# Altium PCB ys18-3 for yi.pcbdoc
Units mil, origin at the board's own origin, x right, y up, seen from the top; angles counter-clockwise.
Board outline 7485 x 3605 mil, 2 copper layers (Top Layer, Bottom Layer); 67 components, 100 nets, 467 pads, 142 vias.
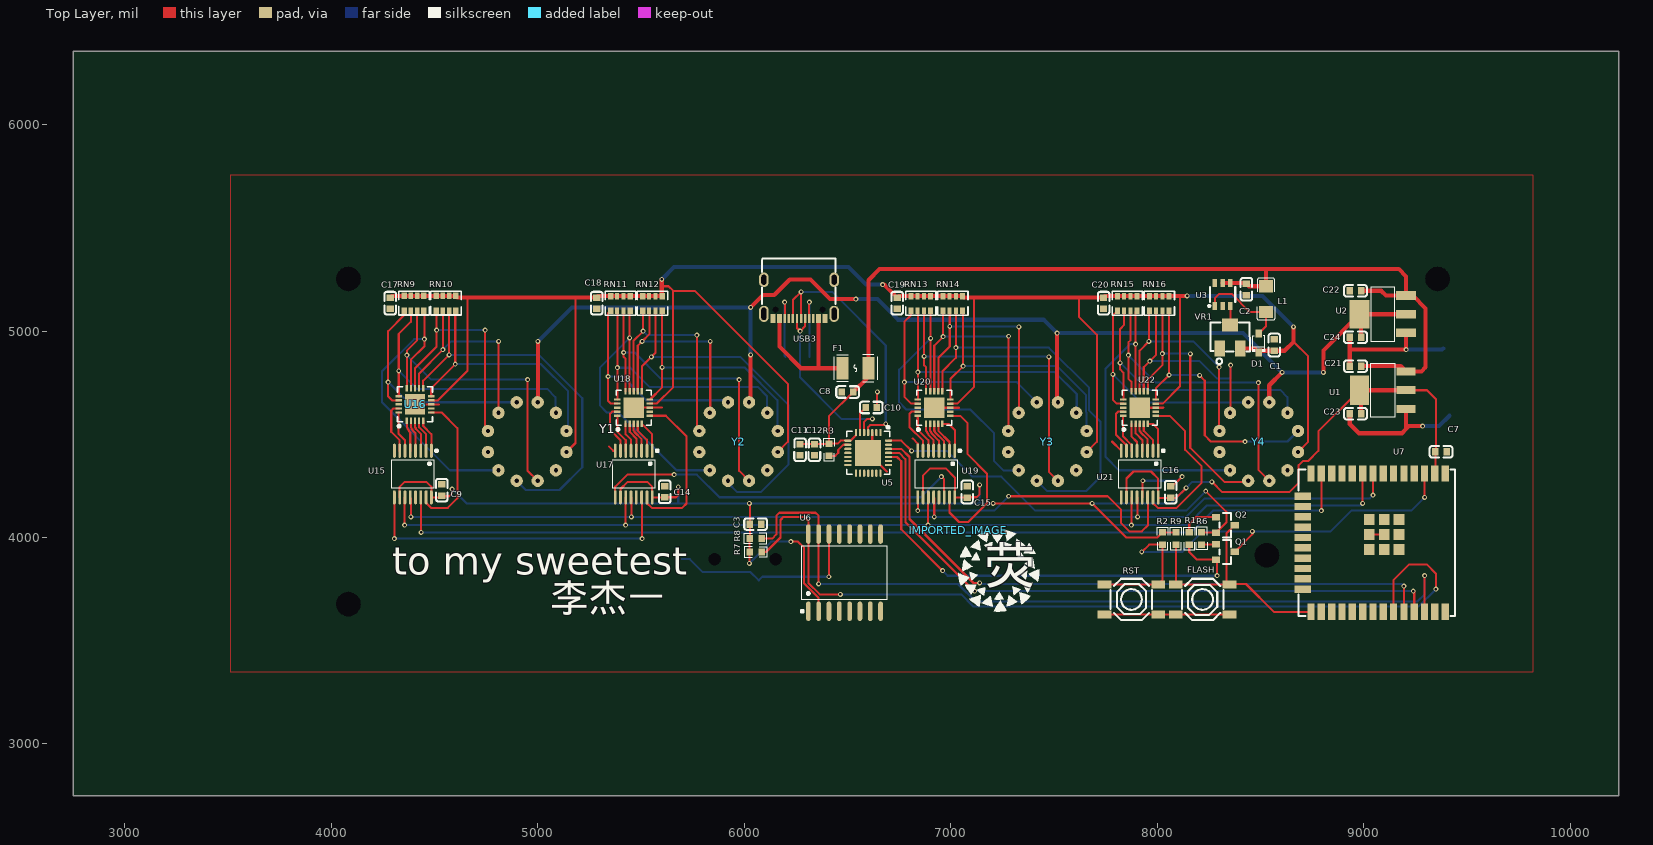
[diagram p0: Top Layer view]
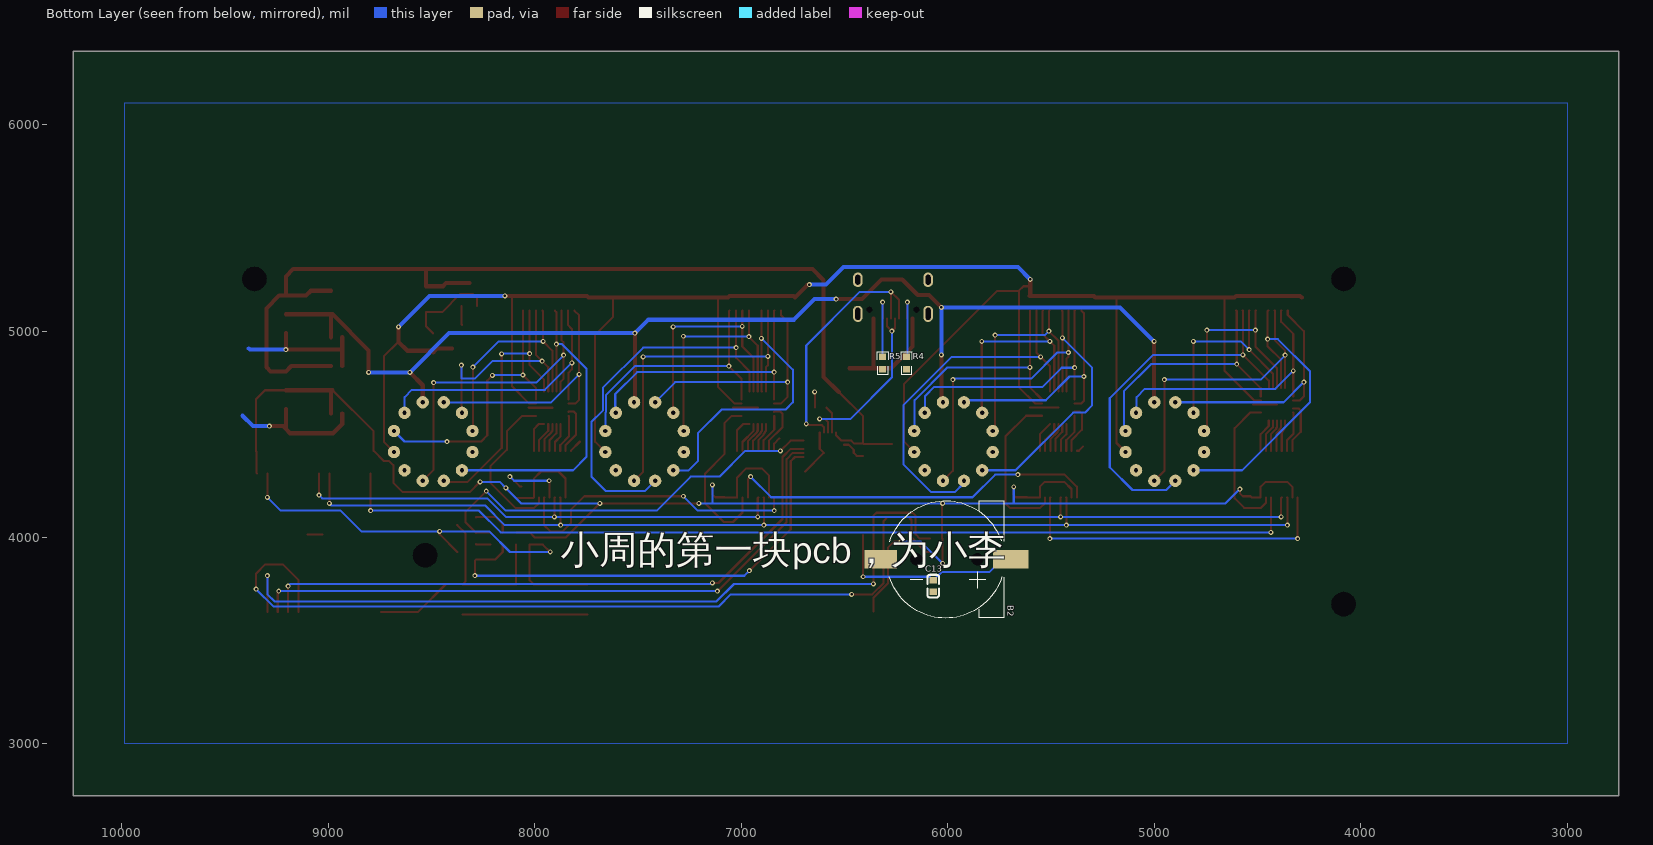
[diagram p1: Bottom Layer view, seen from below]

## Layer stack, top to bottom
Top Solder Mask Layer: solder mask 0.4, Solder Resist, Dk 3.5
Top Layer: signal copper 1.4
Dielectric 1: dielectric 12.6, FR-4, Dk 4.8
Bottom Layer: signal copper 1.4
Bottom Solder Mask Layer: solder mask 0.4, Solder Resist, Dk 3.5

## Board outline
10235,2750 2750,2750 2750,6355 10235,6355
cut-out: 4141.26,5252.4 ccw(c4082.2,5252.4) 4023.15,5252.4 ccw(c4082.2,5252.4)
cut-out: 4141.26,3677.6 ccw(c4082.2,3677.6) 4023.15,3677.6 ccw(c4082.2,3677.6)
cut-out: 9416.85,5252.4 ccw(c9357.8,5252.4) 9298.74,5252.4 ccw(c9357.8,5252.4)
cut-out: 8590.08,3913.82 ccw(c8531.02,3913.82) 8471.97,3913.82 ccw(c8531.02,3913.82)

## Components (designator, comment, footprint, x,y, rotation, side; value= is the part's Value field where it differs from the comment)
B2 "CR1220-2" BAT-SMD_CR1220-2 6010,3895 r0 bottom
C1 "22uF" C0603 8566.83,4932.09 r270 top
C2 "22uF" C0603 8431.83,5202.09 r270 top
C3 "100nF" C0603 6055,4065 r0 top
C7 "100nF" C0603 9375,4415 r0 top
C8 "100nF" C0603 6500,4705 r180 top
C9 "100nF" C0603 4534.72,4229.72 r90 top
C10 "100nF" C0603 6615,4630 r180 top
C11 "100nF" C0603 6269.81,4425.01 r270 top
C12 "100nF" C0603 6339.81,4425.01 r270 top
C13 "100nF" C0603 6070,3765 r90 bottom
C14 "100nF" C0603 5614.23,4221.67 r90 top
C15 "100nF" C0603 7079.8,4221.14 r90 top
C16 "100nF" C0603 8065,4220 r90 top
C17 "100nF" C0603 4285,5135 r270 top
C18 "100nF" C0603 5285,5135 r270 top
C19 "100nF" C0603 6740,5135 r270 top
C20 "100nF" C0603 7740,5135 r270 top
C21 "10uF" C0603 8960,4830 r180 top
C22 "10uF" C0603 8960,5195 r180 top
C23 "22uF" C0603 8960,4600 r180 top
C24 "22uF" C0603 8960,4970 r180 top
D1 "1N5817WS" SOD-323_L1.8-W1.3-LS2.5-RD 8491.83,4942.09 r90 top
F1 "ASMD1210-200" F1210 6537.99,4820 r0 top
FLASH "1TS001G-1500-1700-CT" SW-SMD_4P-L5.1-W5.1-P3.70-LS6.5-TL-2 8219.66,3700 r0 top
IMPORTED_IMAGE "IMPORTED_IMAGE" IMPORTED_IMAGE 7035,4035.76 r0 top
L1 "22uH" L1206 8526.83,5154.39 r90 top
Q1 "S8050" SOT-23_L2.9-W1.3-P1.90-LS2.4-BR 8330,3930 r180 top
Q2 "S8050" SOT-23_L2.9-W1.3-P1.90-LS2.4-BR 8330,4060 r180 top
R1 "10kΩ" R0603 8155,3995 r270 top
R2 "10kΩ" R0603 8025,3995 r270 top
R3 "1kΩ" R0603 6409.81,4425.35 r270 top
R4 "5.1kΩ" R0603 6200,4845.34 r270 bottom
R5 "5.1kΩ" R0603 6315,4845.34 r270 bottom
R6 "10kΩ" R0603 8215,3995 r90 top
R7 "10kΩ" R0603 6055,3930 r180 top
R8 "10kΩ" R0603 6055,3995 r0 top
R9 "10kΩ" R0603 8090,3995 r270 top
RN9 "10kΩ" RES-ARRAY-SMD_0603-8P-L3.2-W1.6-BL 4400,5135 r0 top
RN10 "10kΩ" RES-ARRAY-SMD_0603-8P-L3.2-W1.6-BL 4555,5135 r0 top
RN11 "10kΩ" RES-ARRAY-SMD_0603-8P-L3.2-W1.6-BL 5400,5134.29 r0 top
RN12 "10kΩ" RES-ARRAY-SMD_0603-8P-L3.2-W1.6-BL 5555,5134.29 r0 top
RN13 "10kΩ" RES-ARRAY-SMD_0603-8P-L3.2-W1.6-BL 6855,5134.29 r0 top
RN14 "10kΩ" RES-ARRAY-SMD_0603-8P-L3.2-W1.6-BL 7010,5134.29 r0 top
RN15 "10kΩ" RES-ARRAY-SMD_0603-8P-L3.2-W1.6-BL 7855,5134.29 r0 top
RN16 "10kΩ" RES-ARRAY-SMD_0603-8P-L3.2-W1.6-BL 8010,5134.29 r0 top
RST "1TS001G-1500-1700-CT" SW-SMD_4P-L5.1-W5.1-P3.70-LS6.5-TL-2 7875,3700 r180 top
U1 "AMS1117-3.3" SOT-223-3_L6.7-W3.7-P2.30-LS7.0-BR 9092.49,4713.46 r0 top
U2 "AMS1117-1.5" SOT-223_L6.3-W3.5-P2.30-LS7.0-BR 9092.49,5081.69 r0 top
U3 "MT3608" SOT-23-6_L2.9-W1.6-P0.95-LS2.8-BR 8316.83,5177.09 r270 top
U5 "CP2102-GMR" WQFN-28_L5.0-W5.0-P0.50-BL-EP3.2 6599.99,4409.99 r180 top
U6 "DS3231M+TRL" SOIC-16_L10.3-W7.5-P1.27-LS10.3-BL 6485,3830 r0 top
U7 "ESP32-WROOM-32UE(16MB)" WIFI-SMD_ESP32-WROOM-32UE 9050,3975 r270 top
U15 "SN74HC595PWR" TSSOP-16_L5.0-W4.4-P0.65-LS6.4-BL 4394.72,4307.52 r180 top
U16 "ULN2803A" QFN-20_L4.0-W4.0-P0.50-BL-EP 4405,4645 r0 top
U17 "SN74HC595PWR" TSSOP-16_L5.0-W4.4-P0.65-LS6.4-BL 5464.23,4307.52 r180 top
U18 "ULN2803A" QFN-20_L4.0-W4.0-P0.50-BL-EP 5464.23,4629.23 r0 top
U19 "SN74HC595PWR" TSSOP-16_L5.0-W4.4-P0.65-LS6.4-BL 6929.8,4307.52 r180 top
U20 "ULN2803A" QFN-20_L4.0-W4.0-P0.50-BL-EP 6919.8,4628.7 r0 top
U21 "SN74HC595PWR" TSSOP-16_L5.0-W4.4-P0.65-LS6.4-BL 7915,4307.52 r180 top
U22 "ULN2803A" QFN-20_L4.0-W4.0-P0.50-BL-EP 7915,4628.7 r0 top
USB3 "TYPE-C 16PIN 2MD(073)" USB-C-SMD_TYPE-C-6PIN-2MD-073 6265,5155 r180 top
VR1 "5kΩ" RES-ADJ-SMD_3224W 8351.83,4972.09 r0 top
Y1 "ys18-3" ys18-3 4948.35,4465 r0 top
Y2 "ys18-3" ys18-3 5971.97,4465 r0 top
Y3 "ys18-3" ys18-3 7468.03,4465 r0 top
Y4 "ys18-3" ys18-3 8491.65,4465 r0 top

## Footprints (in the part's own frame and the unit in brackets; to place one, negate y for a bottom-side part, rotate by r counter-clockwise, add the part's x,y. Pads: shape width x height; smd on the part's side, far side on the other; paste and mask are expansions set on the pad)
BAT-SMD_CR1220-2 [mm]
  rect 4.4x2.3 smd: 1(-8,0)
  rect 4x2.3 smd: 2(8,0)
  Multi-Layer board cut-out: 4.35,0 4.276,-0.325 4.068,-0.586 3.767,-0.731 3.433,-0.731 3.132,-0.586 2.924,-0.325 2.85,0 2.85,0 2.924,0.325 3.132,0.586 3.433,0.731 3.767,0.731 4.068,0.586 4.276,0.325 4.35,0
  Multi-Layer board cut-out: -3.15,0 -3.224,-0.325 -3.432,-0.586 -3.733,-0.731 -4.067,-0.731 -4.368,-0.586 -4.576,-0.325 -4.65,0 -4.65,0 -4.576,0.325 -4.368,0.586 -4.067,0.731 -3.733,0.731 -3.432,0.586 -3.224,0.325 -3.15,0
  silkscreen extent -7.22,-7.19 6.92,7.25
C0603 [mm]
  rect 0.8x0.9 smd: 1(-0.7,0) 2(0.7,0)
  silkscreen extent -1.41,-0.71 1.39,0.72
F1210 [mm]
  rect 1.485x2.781 smd: 1(-1.6,0) 2(1.6,0)
  silkscreen extent -2.67,-1.65 2.67,1.65
IMPORTED_IMAGE [mil]
  silkscreen extent 0,-395 394,0
L1206 [mm]
  rect 1.485x1.728 smd: 1(-1.593,0) 2(1.593,0)
  silkscreen extent -2.56,-1.09 2.56,1.09
QFN-20_L4.0-W4.0-P0.50-BL-EP [mil]
  rect 11x31.5 smd: 1(-39.4,-78.7) 2(-19.7,-78.7) 3(0,-78.7) 4(19.7,-78.7) 5(39.4,-78.7) 11(39.4,78.7) 12(19.7,78.7) 13(0,78.7) 14(-19.7,78.7) 15(-39.4,78.7)
  rect 31.5x11 smd: 6(78.7,-39.4) 7(78.7,-19.7) 8(78.7,0) 9(78.7,19.7) 10(78.7,39.4) 16(-78.7,39.4) 17(-78.7,19.7) 18(-78.7,0) 19(-78.7,-19.7) 20(-78.7,-39.4)
  rect 98.4x98.4 smd: 21(0,0)
  silkscreen extent -85,-111 85,85
R0603 [mil]
  rect 31.75x34.02 smd: 1(-29.66,0) 2(29.66,0)
  silkscreen extent -55,-26 55,26
RES-ADJ-SMD_3224W [mm]
  rect 1.3x2 smd: 1(-1.25,-1.45) 3(1.25,-1.45)
  rect 2x1.6 smd: 2(0,1.45)
  silkscreen extent -2.36,-3.36 2.47,1.77
RES-ARRAY-SMD_0603-8P-L3.2-W1.6-BL [mm]
  rect 0.65x0.8 smd: 1(-1.2,-0.9) 4(1.2,-0.9) 5(1.2,0.9) 8(-1.2,0.9)
  rect 0.5x0.8 smd: 2(-0.4,-0.9) 3(0.4,-0.9) 6(0.4,0.9) 7(-0.4,0.9)
  silkscreen extent -1.87,-1.45 1.87,1.47
SOD-323_L1.8-W1.3-LS2.5-RD [mm]
  rect 1x0.75 smd: 1(-1.173,0) 2(1.173,0)
  silkscreen extent -1.08,-0.8 0.9,0.8
SOIC-16_L10.3-W7.5-P1.27-LS10.3-BL [mil]
  oval 22.6x94.51 smd: 1(-175,-187.02) 2(-125,-187.02) 3(-75,-187.02) 4(-25,-187.02) 5(25,-187.02) 6(75,-187.02) 7(125,-187.02) 8(175,-187.02) 9(175,187.02) 10(125,187.02) 11(75,187.02) 12(25,187.02) 13(-25,187.02) 14(-75,187.02) 15(-125,187.02) 16(-175,187.02)
  silkscreen extent -210,-193 206,131
SOT-23-6_L2.9-W1.6-P0.95-LS2.8-BR [mm]
  rect 1x0.55 smd: 1(1.4,-0.95) 2(1.4,0) 3(1.4,0.95) 4(-1.4,0.95) 5(-1.4,0) 6(-1.4,-0.95)
  silkscreen extent -0.9,-1.78 1.52,1.55
SOT-23_L2.9-W1.3-P1.90-LS2.4-BR [mm]
  rect 1x0.8 smd: 1(1.15,-0.95) 2(1.15,0.95) 3(-1.15,0)
  silkscreen extent -0.7,-1.5 0.7,1.5
SOT-223-3_L6.7-W3.7-P2.30-LS7.0-BR [mm]
  rect 2.34x0.98 smd: 1(2.87,-2.3) 2(2.87,0) 3(2.87,2.3)
  rect 2.34x3.6 smd: 4(-2.87,0)
  silkscreen extent -1.47,-3.33 1.47,3.33
SOT-223_L6.3-W3.5-P2.30-LS7.0-BR [mil]
  rect 97x41.3 smd: 1(112.5,-90.5) 2(112.5,0) 3(112.5,90.6)
  rect 97x139.4 smd: 4(-112.5,0)
  silkscreen extent -55,-134 55,134
SW-SMD_4P-L5.1-W5.1-P3.70-LS6.5-TL-2 [mm]
  rect 1.7x1 smd: 1(-3.3,1.85) 2(3.3,1.85) 3(-3.3,-1.85) 4(3.3,-1.85)
  silkscreen extent -2.55,-2.55 2.55,2.55
TSSOP-16_L5.0-W4.4-P0.65-LS6.4-BL [mil]
  oval 13.5x68.2 smd: 1(-89.6,-112.8) 2(-64,-112.8) 3(-38.4,-112.8) 4(-12.8,-112.8) 5(12.8,-112.8) 6(38.4,-112.8) 7(64,-112.8) 8(89.6,-112.8) 9(89.6,112.8) 10(64,112.8) 11(38.4,112.8) 12(12.8,112.8) 13(-12.8,112.8) 14(-38.4,112.8) 15(-64,112.8) 16(-89.6,112.8)
  silkscreen extent -120,-119 101,70
USB-C-SMD_TYPE-C-6PIN-2MD-073 [mm]
  rect 0.6x1.1 smd: 1(-3.2,2.375) 2(-2.4,2.375) 11(2.4,2.375) 12(3.2,2.375)
  rect 0.3x1.1 smd: 3(-1.75,2.375) 4(-1.25,2.375) 5(-0.75,2.375) 6(-0.25,2.375) 7(0.25,2.375) 8(0.75,2.375) 9(1.25,2.375) 10(1.75,2.375)
  oval 1.2x1.8 hole 0.6 slot 1.2 at 90 deg: 13(-4.325,-2.375) 14(4.325,-2.375)
  oval 1.2x2 hole 0.6 slot 1.5 at 90 deg: 13(-4.325,1.825) 14(4.325,1.825)
  Multi-Layer board cut-out: -3.24,1.305 -3.205,1.153 -3.108,1.031 -2.968,0.964 -2.812,0.964 -2.672,1.031 -2.575,1.153 -2.54,1.305 -2.54,1.305 -2.575,1.457 -2.672,1.579 -2.812,1.646 -2.968,1.646 -3.108,1.579 -3.205,1.457 -3.24,1.305
  Multi-Layer board cut-out: 2.54,1.305 2.575,1.153 2.672,1.031 2.812,0.964 2.968,0.964 3.108,1.031 3.205,1.153 3.24,1.305 3.24,1.305 3.205,1.457 3.108,1.579 2.968,1.646 2.812,1.646 2.672,1.579 2.575,1.457 2.54,1.305
  silkscreen extent -4.5,-4.97 4.57,0.6
WIFI-SMD_ESP32-WROOM-32UE [mil]
  rect 78.7x35.4 smd: 1(-334.6,344.7) 2(-334.6,294.7) 3(-334.6,244.7) 4(-334.6,194.7) 5(-334.6,144.7) 6(-334.6,94.7) 7(-334.6,44.7) 8(-334.6,-5.3) 9(-334.6,-55.3) 10(-334.6,-105.3) 11(-334.6,-155.3) 12(-334.6,-205.3) 13(-334.6,-255.3) 14(-334.6,-305.3) 25(334.7,-305.3) 26(334.7,-255.3) 27(334.7,-205.3) 28(334.7,-155.3) 29(334.7,-105.3) 30(334.7,-55.3) 31(334.7,-5.3) 32(334.7,44.7) 33(334.7,94.7) 34(334.7,144.7) 35(334.7,194.7) 36(334.7,244.7) 37(334.7,294.7) 38(334.7,344.7)
  rect 35.4x78.7 smd: 15(-225,-344.7) 16(-175,-344.7) 17(-125,-344.7) 18(-75,-344.7) 19(-25,-344.7) 20(25,-344.7) 21(75,-344.7) 22(125,-344.7) 23(175,-344.7) 24(225,-344.7)
  rect 52.4x52.4 smd: 39(-111.6,121.7) 39(-111.6,49.4) 39(-111.6,-22.8) 39(-39.4,121.7) 39(-39.4,49.4) 39(-39.4,-22.8) 39(32.9,121.7) 39(32.9,49.4) 39(32.9,-22.8)
  silkscreen extent -354,-365 355,392
WQFN-28_L5.0-W5.0-P0.50-BL-EP3.2 [mm]
  oval 0.28x0.9 smd: 1(-1.501,-2.5) 2(-1.001,-2.5) 3(-0.501,-2.5) 4(0,-2.5) 5(0.5,-2.5) 6(1.001,-2.5) 7(1.501,-2.5) 15(1.501,2.5) 16(1.001,2.5) 17(0.5,2.5) 18(0,2.5) 19(-0.501,2.5) 20(-1.001,2.5) 21(-1.501,2.5)
  oval 0.9x0.28 smd: 8(2.5,-1.501) 9(2.5,-1.001) 10(2.5,-0.501) 11(2.5,0) 12(2.5,0.5) 13(2.5,1.001) 14(2.5,1.501) 22(-2.5,1.501) 23(-2.5,1.001) 24(-2.5,0.5) 25(-2.5,0) 26(-2.5,-0.501) 27(-2.5,-1.001) 28(-2.5,-1.501)
  rect 3.2x3.2 smd: 29(0,0)
  silkscreen extent -2.65,-3.3 2.65,2.65
ys18-3 [mil]
  round 60 hole 21: 1(-190.14,-50.95) 2(-139.19,-139.19) 3(-50.95,-190.14) 4(50.95,-190.14) 5(139.19,-139.19) 6(190.14,-50.95) 7(190.14,50.95) 8(139.19,139.19) 9(50.95,190.14) 10(-50.95,190.14) 11(-139.19,139.19) 12(-190.14,50.95)

## Via types
v1: diameter 24.02, hole 12.01, Top Layer to Bottom Layer, 142 vias

## Nets (pads, with @x,y where several pads share a name; then routed paths per layer and width w, separated by ;. In a path a pad name is that pad's centre, name@x,y a point inside that pad or via, vN(x,y) a via of type N, cw(c..) or ccw(c..) an arc to the next point about the centre after c; other vN are vias at no path point)
1_1: RN9.1 U16.17 Y1.10 | length 1170.5
  Top Layer w10: U16.17 4293.55,4664.7 4275,4683.25 v1(4275,4753.13) 4275,5000 4352.76,5077.76 RN9.1
  Bottom Layer w10: v1(4275,4753.13) 4372.99,4655.14 Y1.10
1_2: RN9.2 U16.16 Y1.8 | length 1327.9
  Top Layer w10: U16.16 v1(4326.3,4806.91) 4326.3,4986.3 4385,5045 4385,5098.81 RN9.2
  Bottom Layer w10: v1(4326.3,4806.91) 4413.21,4720 5045,4720 5085,4680 5085,4606.73 Y1.8
1_3: RN9.3 U16.15 Y1.4 | length 1540.6
  Top Layer w10: U16.15 v1(4365.6,4883.18) 4365.6,4905.6 4415,4955 4415,5098.81 RN9.3 ; v1(4950,4765) 4950,4324.15 Y1.4
  Bottom Layer w10: v1(4365.6,4883.18) 4483.78,4765 v1(4950,4765)
1_4: RN9.4 U16.14 Y1.2 | length 1523.8
  Top Layer w10: U16.14 4385.3,4860.3 4450,4925 v1(4450,4960.71) 4450,5096.81 RN9.4
  Bottom Layer w10: v1(4450,4960.71) 4400.71,4960.71 4245,4805 4245,4655 4574.19,4325.81 Y1.2
  other v1: 4450,4960.71
1_5: RN10.1 U16.13 Y1.12 | length 1149.8
  Top Layer w10: U16.13 4405,4820 4510,4925 v1(4510,5004.9) 4510,5097.32 RN10.1 ; v1(4745,5005) 4745,4529.15 Y1.12
  Bottom Layer w10: v1(4510,5004.9) 4744.9,5004.9 v1(4745,5005)
1_6: RN10.2 U16.12 Y1.11 | length 1056.7
  Top Layer w10: U16.12 4424.7,4794.7 v1(4540,4910) 4540,5098.81 RN10.2 ; Y1.11 4810,4605.04 v1(4810,4950)
  Bottom Layer w10: v1(4540,4910) 4580,4950 v1(4810,4950)
  other v1: 4540,4910
1_7: RN10.3 U16.11 Y1.3 | length 1876.9
  Top Layer w10: U16.11 4444.4,4759.4 v1(4570,4885) 4570,5098.81 RN10.3
  Bottom Layer w10: v1(4570,4885) 5005,4885 5215,4675 5215,4340 5105,4230 4942.26,4230 Y1.3
  other v1: 4570,4885
1_8: RN10.4 U16.10 Y1.7 | length 1259.9
  Top Layer w10: U16.10 4483.7,4723.7 v1(4600,4840) 4600,5097.32 RN10.4
  Bottom Layer w10: v1(4600,4840) 5015,4840 5145,4710 5145,4522.46 Y1.7
2_1: RN11.1 U18.17 Y2.10 | length 1126
  Top Layer w10: RN11.1 5340,5086.1 v1(5340,4779.95) 5340,4661.7 5352.78,4648.93 U18.17
  Bottom Layer w10: v1(5340,4779.95) 5410.05,4779.95 5525,4665 5911.16,4665 Y2.10
2_2: RN11.2 U18.16 Y2.8 | length 1293.5
  Top Layer w10: RN11.2 5385.53,5097.58 v1(5385.53,4822.46) U18.16
  Bottom Layer w10: v1(5385.53,4822.46) 5447.54,4822.46 5540,4730 6065,4730 6110,4685 6110,4605.36 Y2.8
2_3: RN11.3 U18.15 Y2.4 | length 1518.3
  Top Layer w10: RN11.3 v1(5415.75,4896.24) 5415.75,4874.25 5424.83,4865.17 U18.15 ; v1(5975,4765) 5975,4322.77 Y2.4
  Bottom Layer w10: v1(5415.75,4896.24) 5468.76,4896.24 5595,4770 5970,4770 v1(5975,4765)
2_4: RN11.4 U18.14 Y2.2 | length 1442.4
  Top Layer w10: U18.14 v1(5444.53,4967.52) 5444.53,5096.14 RN11.4
  Bottom Layer w10: v1(5444.53,4967.52) 5300,4822.99 5300,4640 5335,4605 5392.54,4605 5671.73,4325.81 Y2.2
  other v1: 5444.53,4967.52
2_5: RN12.1 U18.13 Y2.12 | length 1148.1
  Top Layer w10: U18.13 5464.23,4954.23 v1(5510,5000) 5510,5096.62 RN12.1 ; v1(5770,4980) 5770,4527.77 Y2.12
  Bottom Layer w10: v1(5510,5000) 5530,4980 v1(5770,4980)
2_6: RN12.2 U18.12 Y2.11 | length 1091.8
  Top Layer w10: U18.12 5483.93,4928.93 v1(5504.54,4949.54) 5540,4985 5540,5098.11 RN12.2 ; Y2.11 5835,4606.42 v1(5835,4950)
  Bottom Layer w10: v1(5504.54,4949.54) 5834.54,4949.54 v1(5835,4950)
2_7: RN12.3 U18.11 Y2.3 | length 1844.9
  Top Layer w10: U18.11 5503.63,4828.63 v1(5550.23,4875.23) 5570,4895 5570,5098.11 RN12.3
  Bottom Layer w10: v1(5550.23,4875.23) 5979.77,4875.23 6215,4640 6215,4355 6080,4220 5965,4220 5921.02,4263.98 Y2.3
  other v1: 5550.23,4875.23
2_8: RN12.4 U18.10 Y2.7 | length 1228.3
  Top Layer w10: U18.10 5602.24,4727.94 v1(5602.24,4823.86) RN12.4
  Bottom Layer w10: v1(5602.24,4823.86) 6001.14,4823.86 6160,4665 6160,4518.06 Y2.7
3_1: RN13.1 U20.17 Y3.10 | length 1193
  Top Layer w10: RN13.1 6807.76,5077.76 6775,5045 v1(6775,4752.54) 6775,4681.75 6808.35,4648.4 U20.17
  Bottom Layer w10: v1(6775,4752.54) 7319.68,4752.54 Y3.10
3_2: RN13.2 U20.16 Y3.8 | length 1336.4
  Top Layer w10: RN13.2 6841.1,5097.01 v1(6841.1,4801.31) U20.16
  Bottom Layer w10: v1(6841.1,4801.31) 7503.69,4801.31 7610,4695 7610,4606.97 Y3.8
3_3: RN13.3 U20.15 Y3.4 | length 1618.9
  Top Layer w10: RN13.3 v1(6870.75,4876.96) 6870.75,4834.25 6880.4,4824.6 U20.15 ; v1(7475,4875) 7475,4318.84 Y3.4
  Bottom Layer w10: v1(6870.75,4876.96) 7473.04,4876.96 v1(7475,4875)
3_4: RN13.4 U20.14 Y3.2 | length 1560.2
  Top Layer w10: U20.14 6902.24,4709.54 v1(6902.24,4964.83) RN13.4
  Bottom Layer w10: v1(6902.24,4964.83) 6750,4812.59 6750,4655 6785,4620 7095,4620 7210,4505 7210,4370 7255,4325 7328.03,4325 Y3.2
  other v1: 6902.24,4964.83
3_5: RN14.1 U20.13 Y3.12 | length 1187.3
  Top Layer w10: U20.13 6919.8,4929.8 v1(6962.76,4972.76) RN14.1 ; Y3.12 7280,4518.06 v1(7280,4975)
  Bottom Layer w10: v1(6962.76,4972.76) 7277.76,4972.76 v1(7280,4975)
3_6: RN14.2 U20.12 Y3.11 | length 1167.2
  Top Layer w10: U20.12 6939.5,4869.5 6995,4925 v1(6995,5022.84) 6995,5098.11 RN14.2 ; Y3.11 7330,4605.36 v1(7330,5020)
  Bottom Layer w10: v1(6995,5022.84) 7327.16,5022.84 v1(7330,5020)
  other v1: 6995,5022.84
3_7: RN14.3 U20.11 Y3.3 | length 1955
  Top Layer w10: U20.11 6959.2,4804.2 7025,4870 v1(7025,4919.78) 7025,5098.11 RN14.3
  Bottom Layer w10: v1(7025,4919.78) 7475.22,4919.78 7670,4725 7670,4615 7725,4560 7725,4295 7655,4225 7466.94,4225 Y3.3
  other v1: 7025,4919.78
3_8: RN14.4 U20.10 Y3.7 | length 1285.7
  Top Layer w10: U20.10 6998.5,4768.5 v1(7060,4830) 7060,5096.1 RN14.4
  Bottom Layer w10: v1(7060,4830) 7515,4830 7654,4691 7654,4608.37 7658.17,4604.2 Y3.7
4_1: RN15.1 U22.17 Y4.10 | length 1212.1
  Top Layer w10: RN15.1 7785,5076.1 v1(7785,4790.34) 7785,4666.95 7803.55,4648.4 U22.17
  Bottom Layer w10: v1(7785,4790.34) 7920.34,4655 8440.56,4655 Y4.10
  other v1: 7785,4790.34
4_2: RN15.2 U22.16 Y4.8 | length 1401.1
  Top Layer w10: U22.16 7836.3,4798.7 7820,4815 v1(7820,4846.13) 7820,5010 7840,5030 7840,5098.11 RN15.2
  Bottom Layer w10: v1(7820,4846.13) 7951.13,4715 8595,4715 8630,4680 8630,4605.04 Y4.8
4_3: RN15.3 U22.15 Y4.4 | length 1584.7
  Top Layer w10: RN15.3 7870.75,4955.75 7860,4945 v1(7860,4883.64) 7860,4770 7875,4755 7875,4708 U22.15 ; v1(8490,4750) 8490,4327.46 Y4.4
  Bottom Layer w10: v1(7860,4883.64) 7993.64,4750 v1(8490,4750)
4_4: RN15.4 U22.14 Y4.2 | length 1646.4
  Top Layer w10: U22.14 v1(7895.3,4937) 7895.3,5091.92 RN15.4
  Bottom Layer w10: v1(7895.3,4937) 7868.29,4937 7750,4818.7 7750,4390 7814.19,4325.81 Y4.2
  other v1: 7895.3,4937
4_5: RN16.1 U22.13 Y4.12 | length 1112.7
  Top Layer w10: U22.13 7915,4905 v1(7960,4950) 7960,5096.1 RN16.1 ; v1(8300,4825) 8300,4517.46 Y4.12
  Bottom Layer w10: v1(7960,4950) 8175,4950 v1(8300,4825)
4_6: RN16.2 U22.12 Y4.11 | length 1139
  Top Layer w10: U22.12 7934.7,4824.7 v1(7964.63,4854.63) 7995,4885 7995,5098.11 RN16.2 ; Y4.11 8355,4606.73 v1(8355,4835)
  Bottom Layer w10: v1(7964.63,4854.63) 8205.37,4854.63 8290,4770 8355,4770 v1(8355,4835)
  other v1: 7964.63,4854.63
4_7: RN16.3 U22.11 Y4.3 | length 1362.5
  Top Layer w10: U22.11 7954.4,4764.4 8025,4835 v1(8025,4891.14) 8025,5098.11 RN16.3 ; v1(8160,4890) 8160,4435 8325,4270 8435.85,4270 Y4.3
  Bottom Layer w10: v1(8025,4891.14) 8158.86,4891.14 v1(8160,4890)
  other v1: 8025,4891.14
4_8: RN16.4 U22.10 Y4.7 | length 1391.4
  Top Layer w10: U22.10 7993.7,4723.7 v1(8057.24,4787.24) RN16.4 ; v1(8205,4785) 8230,4760 8230,4495 8260,4465 v1(8425,4465)
  Bottom Layer w10: v1(8057.24,4787.24) 8202.76,4787.24 v1(8205,4785) ; v1(8425,4465) 8630.85,4465 Y4.7
  other v1: 8057.24,4787.24
$1N4284: D1.2 L1.1 U3.1 | length 447.9
  Top Layer w10: U3.1 8279.43,5159.43 8300,5180 8360,5180 8448.31,5091.69 L1.1 8526.83,5023.26 D1.2
$1N4599: U3.3 VR1.2 | length 93.8
  Top Layer w10: VR1.2 8354.23,5031.58 U3.3
$1N14386: R3.2 U5.9 | length 122.8
  Top Layer w10: R3.2 6440.69,4395.69 6455,4410 6455,4425 6479.4,4449.4 U5.9
$1N14387: C10.2 U5.6 | length 132.7
  Top Layer w10: U5.6 6560.6,4603.16 C10.2
$1N15726: Q1.1 R6.1 | length 70.6
  Top Layer w10: R6.1 8282.66,3965.34 Q1.1
$1N15827: Q2.1 R1.1 | length 185.6
  Top Layer w10: R1.1 8155,4065 8190,4100 8282.13,4100 Q2.1
$1N19738: B2.1 C13.2 U6.14 | length 966.6
  Top Layer w10: v1(6410,3810) U6.14@6410,4012.02
  Bottom Layer w10: B2.1 5736.38,3895 5798.62,3832.76 6029.8,3832.76 C13.2 6087.44,3810 v1(6410,3810)
$1N85374: U15.15 U16.6 | length 705.3
  Top Layer w10: U15.15 4458.72,4167.37 4482.47,4143.62 4563.62,4143.62 4610,4190 4610,4530 4534.4,4605.6 U16.6
$1N85867: U15.1 U16.5 | length 162.5
  Top Layer w10: U16.5 4445,4565.7 4445,4540 4484.32,4500.68 U15.1
$1N86064: U15.2 U16.4 | length 160.1
  Top Layer w10: U16.4 4424.7,4533.55 4458.72,4499.53 U15.2
$1N86261: U15.3 U16.3 | length 157.6
  Top Layer w10: U16.3 4405,4533.55 4408.7,4529.85 4408.7,4526.92 4433.12,4502.5 U15.3
$1N86458: U15.4 U16.2 | length 155.2
  Top Layer w10: U16.2 4385.3,4533.55 4389,4529.85 4389,4526.92 4392.7,4523.22 4392.7,4520.3 4407.52,4505.48 U15.4
$1N86655: U15.5 U16.1 | length 152.7
  Top Layer w10: U16.1 4365.6,4533.55 4369.3,4529.85 4369.3,4526.92 4373,4523.22 4373,4520.3 4376.7,4516.6 4376.7,4513.67 4381.92,4508.45 U15.5
$1N86852: U15.6 U16.20 | length 198.8
  Top Layer w10: U16.20 4325,4604.3 4325,4502.74 4356.32,4471.42 U15.6
$1N87053: U15.7 U16.19 | length 252.1
  Top Layer w10: U16.19 4326,4625 4300,4625 4290,4615 4290,4512.14 4330.72,4471.42 U15.7
$1N88441: U17.15 U18.6 | length 781.2
  Top Layer w10: U17.15 5528.23,4167.37 5551.98,4143.62 5698.62,4143.62 5720,4165 5720,4490 5620.17,4589.83 U18.6
$1N88442: U17.6 U18.20 | length 186.6
  Top Layer w10: U18.20 5385,4589.3 5385,4512.25 5425.83,4471.42 U17.6
$1N88443: U17.7 U18.19 | length 240.3
  Top Layer w10: U18.19 5385.05,4610 5360,4610 5350,4600 5350,4521.65 5400.23,4471.42 U17.7
$1N88444: U17.1 U18.5 | length 151
  Top Layer w10: U18.5 5553.83,4500.33 U17.1
$1N88445: U17.2 U18.4 | length 148.6
  Top Layer w10: U18.4 5483.93,4517.78 5528.23,4473.48 U17.2
$1N88446: U17.3 U18.3 | length 146.1
  Top Layer w10: U18.3 5464.23,4517.78 5467.93,4514.08 5467.93,4511.15 5502.63,4476.45 U17.3
$1N88447: U17.4 U18.2 | length 143.7
  Top Layer w10: U18.2 5445,4550.05 5445,4511.45 5477.03,4479.42 U17.4
$1N88448: U17.5 U18.1 | length 141.2
  Top Layer w10: U18.1 5425,4550.35 5425,4500 5451.43,4473.57 U17.5
$1N89132: U19.15 U20.6 | length 836.2
  Top Layer w10: U19.15 6993.8,4121.2 7040,4075 7085,4075 7175,4165 7175,4310 7080,4405 7080,4555 7045.7,4589.3 U20.6
$1N89133: U19.6 U20.20 | length 190.7
  Top Layer w10: U20.20 6840,4588.2 6840,4522.82 6891.4,4471.42 U19.6
$1N89134: U19.7 U20.19 | length 252.6
  Top Layer w10: U20.19 6840.1,4610 6810,4610 6800,4600 6800,4535 6865.8,4469.2 U19.7
$1N89135: U19.1 U20.5 | length 172.7
  Top Layer w10: U20.5 6990,4550 7019.4,4520.6 U19.1
$1N89136: U19.2 U20.4 | length 152.2
  Top Layer w10: U20.4 6939.5,4517.25 6993.8,4462.95 U19.2
$1N89137: U19.3 U20.3 | length 149.7
  Top Layer w10: U20.3 6919.8,4517.25 6923.5,4513.55 6923.5,4510.62 6968.2,4465.92 U19.3
$1N89138: U19.4 U20.2 | length 147.3
  Top Layer w10: U20.2 6900.1,4517.25 6903.8,4513.55 6903.8,4510.62 6907.5,4506.92 6907.5,4503.99 6942.6,4468.89 U19.4
$1N89139: U19.5 U20.1 | length 144.8
  Top Layer w10: U20.1 6880.4,4517.25 6884.1,4513.55 6884.1,4510.62 6887.8,4506.92 6887.8,4503.99 6891.5,4500.29 6891.5,4497.37 6917,4471.87 U19.5
$1N89823: U21.15 U22.6 | length 778.7
  Top Layer w10: U21.15 7979,4167.37 8002.75,4143.62 8093.62,4143.62 8215,4265 8215,4345 8135,4425 8135,4515 8060.7,4589.3 U22.6
$1N89824: U21.6 U22.20 | length 186.8
  Top Layer w10: U22.20 7835,4588 7835,4489.27 7876.6,4447.67 U21.6
$1N89825: U21.7 U22.19 | length 241.7
  Top Layer w10: U22.19 7835.3,4610 7810,4610 7800,4600 7800,4498.67 7851,4447.67 U21.7
$1N89826: U21.1 U22.5 | length 165.5
  Top Layer w10: U22.5 7980,4550 8004.6,4525.4 U21.1
$1N89827: U21.2 U22.4 | length 148
  Top Layer w10: U22.4 7934.7,4517.25 7979,4472.95 U21.2
$1N89828: U21.3 U22.3 | length 145.6
  Top Layer w10: U22.3 7915,4517.25 7918.7,4513.55 7918.7,4510.62 7953.4,4475.92 U21.3
$1N89829: U21.4 U22.2 | length 143.4
  Top Layer w10: U22.2 7895,4549.7 7895,4505 7927.8,4472.2 U21.4
$1N89830: U21.5 U22.1 | length 141.2
  Top Layer w10: U22.1 7875,4549.4 7875,4490 7902.2,4462.8 U21.5
$1N135441: Y1.5
$1N140475: Y2.5
$1N142648: Y3.5
$1N144821: Y4.5
+1.5V: C24.1 U2.2 U2.4 Y1.9 Y2.9 Y3.9 Y4.9 | length 6082.3
  Top Layer w20: v1(4999.3,4655.14) 5000,4655.85 v1(5000,4950) ; v1(6022.92,4655.14) 6030,4662.23 v1(6030,4885) ; v1(6030,5115) 6090,5175 6145,5175 6220,5250 6320,5250 6415,5155 v1(6540,5155) ; v1(7515,4990) 7515,4659.12 v1(7518.98,4655.14) ; v1(8542.6,4655.14) 8542.6,4737.6 v1(8605,4800) ; v1(8805,4800) 8805,4906.7 U2.4 ; C24.1 8987.56,5074.12 U2.4 ; U2.2 U2.4
  Bottom Layer w20: v1(5000,4950) 5165,5115 v1(6030,5115) v1(6030,4885) ; v1(6540,5155) 6645,5155 6745,5055 7450,5055 v1(7515,4990) 8415,4990 v1(8605,4800) v1(8805,4800) ; Y4.9@8535.14,4655.14 v1(8542.6,4655.14)
  other v1: 6030,5115
+3.3V: C3.1 C7.1 C9.1 C14.1 C15.1 C16.1 C23.1 R2.1 R7.2 R8.1 R9.1 U1.2 U1.4 U6.2 U7.2 U15.10 U15.16 U17.10 U17.16 U19.10 U19.16 U21.10 U21.16 | length 9195.6
  Top Layer w10: U15.10 4330.72,4245.72 4355,4270 4460.14,4270 4484.32,4245.82 U15.16 4527.28,4194.72 C9.1 4536.88,4200 4570,4200 4585,4215 v1(4585,4235) ; U17.10 5400.23,4235.23 5435,4270 5529.65,4270 5553.83,4245.82 U17.16 5613.61,4194.72 C14.1 5615.12,4195 5670,4195 5680,4205 v1(5680,4245) ; v1(6025,3875) 6025,3929.66 R7.2 R8.1 6027.44,3997.1 C3.1 6027.44,4162.56 v1(6025,4165) ; v1(6225,3980) 6260,3980 6290,3950 6290,3777.23 6360,3707.23 U6.2 ; U19.10 6865.8,4300.8 6900,4335 6975,4335 7019.4,4290.6 U19.16 7020.54,4193.58 C15.1 7081.22,4195 7125,4195 7140,4210 v1(7140,4255) ; v1(7205,4165) v1(7685,4165) 7850,4000 8000.34,4000 R2.1 R9.1 ; U21.10 7851,4286 7885,4320 7970,4320 8004.6,4285.4 U21.16 8006.88,4192.44 C16.1 8092.44,4192.44 v1(8140,4240) ; v1(8265,4270) 8315,4220 8640,4220 8685,4265 8685,4350 8705,4370 8730,4370 8780,4420 8780,4513.96 U1.4 ; U1.2 9306.54,4713.46 9350,4670 9350,4417.56 C7.1 9347.44,4312.34 U7.2
  Top Layer w20: C23.1 8987.56,4705.4 U1.4 U1.2
  Bottom Layer w10: v1(4585,4235) 4655,4165 5680,4165 ; v1(5680,4245) 5680,4165 ; v1(6025,3875) 6130,3980 v1(6225,3980) ; v1(7140,4255) 7140,4165 ; v1(7205,4165) 7140,4165 ; v1(7685,4165) 8065,4165 v1(8140,4240) 8170,4270 v1(8265,4270) ; 5680,4165 v1(6025,4165) 7140,4165
  other v1: 7205,4165 7685,4165 7685,4165 8140,4240
+5V: C2.1 C8.1 C11.1 C12.1 C21.1 C22.1 F1.2 L1.2 R3.1 U1.3 U2.3 U3.4 U3.5 U5.7 U5.8 | length 5169.1
  Top Layer w10: C11.1 C12.1 6407.37,4452.56 R3.1 ; U5.8 6466.85,4469.1 6452.76,4455.01 R3.1 ; U5.8 6514.1,4469.1 6540.9,4495.9 U5.7 ; C8.1 6409.81,4587.25 R3.1
  Top Layer w20: C8.1 6600.98,4778.42 F1.2 6600.98,5245.98 6655,5300 8526.56,5300 ; U3.5 U3.4 8429.27,5232.21 C2.1 8444.39,5217.09 L1.2 8526.83,5299.73 8526.56,5300 ; C21.1 9179.49,4830 U1.3 9206.47,4805 9280,4805 9300,4825 9300,5110 9237.71,5172.29 U2.3 ; C22.1 9085,5195 9107.71,5172.29 U2.3 ; 8526.56,5300 9170,5300 9205,5265 U2.3
+20V: C1.2 C17.1 C18.1 C19.1 C20.1 D1.1 RN9.5 RN9.6 RN9.7 RN9.8 RN10.5 RN10.6 RN10.7 RN10.8 RN11.5 RN11.6 RN11.7 RN11.8 RN12.5 RN12.6 RN12.7 RN12.8 RN13.5 RN13.6 RN13.7 RN13.8 RN14.5 RN14.6 RN14.7 RN14.8 RN15.5 RN15.6 RN15.7 RN15.8 RN16.5 RN16.6 RN16.7 RN16.8 U16.9 U18.9 U20.9 U22.9 VR1.3 Y1.6 Y2.6 Y3.6 Y4.6 | length 10669.5
  Top Layer w10: U16.9 4516.45,4664.7 4659.39,4807.64 4659.39,5162.56 ; Y1.6 5182.22,4457.79 5182.22,5162.56 ; U18.9 5575.68,4648.93 5655,4728.25 5655,5195 ; 5600,5217.08 5632.92,5217.08 5655,5195 ; Y2.6 6211.11,4463.05 6211.11,4743.89 5760,5195 5655,5195 ; U20.9 7031.25,4648.4 7111.43,4728.58 7111.43,5162.56 ; 7616.07,5162.56 7620,5158.63 7620,5070 7707.17,4982.83 7707.17,4463.05 Y3.6 ; U22.9 8026.45,4648.4 8109.41,4731.36 8109.41,5169.73 ; 8660,4947.98 8730.8,4877.19 8730.8,4463.05 Y4.6
  Top Layer w20: C17.1 4292.88,5170.44 RN9.8 RN9.7 RN9.6 RN9.5 RN10.8 RN10.7 RN10.6 RN10.5 4610.11,5162.56 4659.39,5162.56 5182.22,5162.56 C18.1 5292.17,5169.73 RN11.8 RN11.7 RN11.6 RN11.5 RN12.8 RN12.7 RN12.6 RN12.5 5600,5171.97 5600,5217.08 v1(5600,5250) ; v1(6670,5225) 6677.56,5225 C19.1 6747.17,5169.73 RN13.8 RN13.7 RN13.6 RN13.5 RN14.8 RN14.7 RN14.6 RN14.5 7064.41,5162.56 7111.43,5162.56 7616.07,5162.56 C20.1 7747.17,5169.73 RN15.8 RN15.7 RN15.6 RN15.5 RN16.8 RN16.7 RN16.6 RN16.5 8109.41,5169.73 8144.73,5169.73 v1(8145,5170) ; VR1.3 8472.75,4915.01 D1.1 8500.44,4904.53 C1.2 8616.55,4904.53 8660,4947.98 v1(8660,5020)
  Bottom Layer w20: v1(5600,5250) 5660,5310 6505,5310 6590,5225 v1(6670,5225) ; v1(8145,5170) 8510,5170 v1(8660,5020)
CC1: R5.1 USB3.4 | length 343.8
  Top Layer w10: USB3.4 6314.2,5139.2 v1(6315,5140)
  Bottom Layer w10: R5.1 v1(6315,5140)
CC2: R4.1 USB3.10 | length 346
  Top Layer w10: v1(6195,5140) 6196.1,5138.9 USB3.10
  Bottom Layer w10: v1(6195,5140) 6195,4880 R4.1
CLK: U7.9 U15.11 U17.11 U19.11 U21.11 | length 5369.2
  Top Layer w10: v1(4355,4060) 4355,4193.4 U15.11 ; v1(5425,4060) 5425,4193.89 U17.11 ; v1(6890,4060) 6890,4193.32 U19.11 ; v1(7875,4060) 7875,4193.12 U21.11 ; U7.9 8994.7,4165.3 v1(8995,4165)
  Bottom Layer w10: v1(4355,4060) v1(5425,4060) v1(6890,4060) v1(7875,4060) 8145,4060 8240,4155 8985,4155 v1(8995,4165)
  other v1: 5425,4060 6890,4060 7875,4060
DATAIN: U7.13 U15.14 | length 4753.7
  Top Layer w10: U15.14 4435,4192.84 v1(4435,4025) ; U7.13 8794.7,4130.3 v1(8795,4130)
  Bottom Layer w10: v1(4435,4025) 8165,4025 8270,4130 v1(8795,4130)
DN: U5.5 USB3.5 USB3.7 | length 895.1
  Top Layer w10: USB3.7 6255.15,5014.85 v1(6270,5000) 6294.52,5024.52 USB3.5 ; U5.5 6580,4508.72 6580,4560 6595,4575 v1(6620,4575)
  Bottom Layer w10: v1(6270,5000) 6270,4775 6470,4575 v1(6620,4575)
  other v1: 6270,5000
DP: U5.4 USB3.6 USB3.8 | length 1288.7
  Top Layer w10: USB3.8 6235.48,5150.48 v1@6274.85,5189.85 ; USB3.6 v1@6274.85,5189.85 ; v1(6275,5190) v1@6274.85,5189.85 ; U5.4 6600,4535 6610,4545 6680,4545 v1(6685,4550)
  Bottom Layer w10: v1(6275,5190) 6425,5190 6685,4930 v1(6685,4550)
DTR: Q2.2 R6.2 U5.28 | length 2051.6
  Top Layer w10: U5.28 6760.9,4469.1 v1(6810,4420) ; R6.2 8282.66,4024.66 Q2.2 8335,4072.87 8335,4125 v1(8235,4225)
  Bottom Layer w10: v1(6810,4420) 6980,4420 7105,4295 7245,4295 7410,4130 8140,4130 v1(8235,4225)
ESP32_EN: Q1.3 R2.2 RST.3 RST.4 U7.3 | length 2305.2
  Top Layer w10: RST.4 RST.3 8025,3792.92 R2.2 7960.34,3965.34 v1(7925,3930) ; Q1.3 8460.71,4015.43 v1(8460.71,4030) ; U7.3 9294.7,4195.3 v1(9295,4195)
  Bottom Layer w10: v1(7925,3930) 8120,3930 8220,4030 v1(8460.71,4030) 8840,4030 8940,4130 9230,4130 v1(9295,4195)
  other v1: 8460.71,4030
GND: B2.2 C1.1 C2.2 C3.2 C7.2 C8.2 C9.2 C10.1 C11.2 C12.2 C13.1 C14.2 C15.2 C16.2 C17.2 C18.2 C19.2 C20.2 C21.2 C22.2 C23.2 C24.2 FLASH.3 FLASH.4 R4.2 R5.2 RST.1 RST.2 U1.1 U2.1 U3.2 U5.3 U5.29 U6.13 U7.1 U7.15 U7.38 U7.39 U15.8 U15.13 U16.8 U16.21 U17.8 U17.13 U18.8 U18.21 U19.8 U19.13 U20.8 U20.21 U21.8 U21.13 U22.8 U22.21 USB3.1 USB3.12 VR1.1 Y1.1 Y2.1 Y3.1 Y4.1 | length 3359.5
  Top Layer w10: U16.21 U16.8 4520,4645 ; 5345,4440 5364.68,4420.32 U17.8 ; U18.21 U18.8 5599.23,4629.23 5600,4630 ; U5.3 6619.7,4429.7 U5.29 6690,4320 ; C10.1 6642.56,4702.56 v1(6645,4705) ; 6815,4480 6840.2,4454.8 U19.8 ; U20.21 U20.8 7038.7,4628.7 7040,4630 ; RST.2 RST.1 FLASH.3 FLASH.4 ; 7780,4465 7780.72,4465 U21.8 ; U22.21 U22.8 8028.7,4628.7 8030,4630 ; U21.13 7927.8,4272.8 v1(7930,4275) ; C16.2 8072.56,4247.56 v1(8120,4295) ; U7.39@9027.2,4014.4 U7.39@9099.4,4014.4
  Top Layer w20: C23.2 8932.44,4550.28 8977.72,4505 9185,4505 9205.48,4525.48 ; C21.2 8932.44,4910.28 ; C24.2 8932.44,4910.28 ; U2.1 v1(9205,4910) 9204.72,4910.28 8932.44,4910.28 ; U1.1 9205.48,4525.48 ; v1(9285,4540) 9220,4540 9205.48,4525.48
  Bottom Layer w10: v1(7930,4275) 8100,4275 v1(8120,4295)
  Bottom Layer w20: v1(9205,4910) 9380,4910 9385,4915 ; v1(9285,4540) 9365,4540 9415,4590
  other v1: 5781.83,4414.05 9205,4910
IO0: FLASH.1 FLASH.2 Q2.3 R9.2 U7.25 | length 1214.1
  Top Layer w10: R9.2 8090,3773.1 FLASH.1 FLASH.2 ; Q2.3 8335,4019.72 8335,3787.43 FLASH.2 ; U7.25 8564.7,3640.3 8430,3775 8351.74,3775 FLASH.2
LATCHPIN: U7.8 U15.12 U17.12 U19.12 U21.12 | length 5191.3
  Top Layer w10: U15.12 4385,4191.64 v1(4385,4100) ; U17.12 5452.79,4193.36 v1(5452.79,4100) ; U19.12 6920,4191.72 v1(6920,4100) ; U21.12 7905,4191.92 v1(7905,4100) ; U7.8 9044.7,4205.3 v1(9045,4205)
  Bottom Layer w10: v1(4385,4100) v1(5452.79,4100) v1(6920,4100) v1(7905,4100) 8140,4100 8230,4190 9030,4190 v1(9045,4205)
RTS: Q1.2 R1.2 U5.24 | length 2283.5
  Top Layer w10: U5.24 6739.7,4390.3 6760,4370 6760,4040 v1(6960,3840) ; R1.2 8155,3930 8192.4,3892.6 Q1.2 8290,3887.32 v1(8290,3815)
  Bottom Layer w10: v1(6960,3840) 6985,3815 v1(8290,3815)
RX: U5.26 U7.34 | length 3072.5
  Top Layer w10: U5.26 6760.3,4429.7 6800,4390 6800,4090 7110,3780 v1(7140,3780) ; U7.34 9195,3640.6 v1(9195,3765)
  Bottom Layer w10: v1(7140,3780) 7145,3775 9185,3775 v1(9195,3765)
SCL: R7.1 U6.16 U7.33 | length 4261.2
  Top Layer w10: R7.1 6105,3930 6175,4000 6175,4085 6190,4100 6290,4100 6310,4080 U6.16 6310,3780 6365,3725 v1(6465,3725) ; U7.33 9145,3640.6 9145,3795 9220,3870 9305,3870 9350,3825 v1(9350,3750)
  Bottom Layer w10: v1(6465,3725) 7050,3725 7110,3665 9265,3665 v1(9350,3750)
SDA: R8.2 U6.15 U7.36 | length 3965.6
  Top Layer w10: R8.2 6135,3995 6155,4015 6155,4105 6170,4120 6345,4120 6360,4105 6360,4012.02 v1(6360,3775) ; U7.36 9295,3640.6 v1(9295,3815)
  Bottom Layer w10: v1(6360,3775) 7035,3775 7120,3690 9260,3690 9295,3725 v1(9295,3815)
SN_1: U15.9 U17.14 | length 1600.5
  Top Layer w10: v1(4305,3995) 4305.12,3995.12 U15.9 ; U17.14 5505,4192.35 v1(5505,3995)
  Bottom Layer w10: v1(4305,3995) v1(5505,3995)
SN_2: U17.9 U19.14 | length 1843.7
  Top Layer w10: U17.9 5374.63,4245.82 5433.81,4305 v1(5660,4305) ; v1(6955,4295) 6968.2,4281.8 U19.14
  Bottom Layer w10: v1@5665,4305 5770,4305 5880,4195 6855,4195 v1(6955,4295)
SN_3: U19.9 U21.14 | length 1465.1
  Top Layer w10: v1(6840,4130) 6840.2,4130.2 U19.9 ; v1(7280,4200) 7760,4200 7825,4135 7825,4070 7865,4030 7925,4030 7955,4060 7955,4193.12 U21.14
  Bottom Layer w10: v1(6840,4130) 7210,4130 v1(7280,4200)
TX: U5.25 U7.35 | length 3099.4
  Top Layer w10: U5.25 6750,4410 6780,4380 6780,4075 v1(7115,3740) ; v1(9240,3740) 9244.7,3735.3 U7.35
  Bottom Layer w10: v1(7115,3740) v1(9240,3740)
VBUS: F1.1 USB3.2 USB3.11 | length 726.6
  Top Layer w20: USB3.11 6170.51,4924.49 6275,4820 6358.6,4820 ; USB3.2 6359.48,4820.89 6358.6,4820 ; F1.1 6358.6,4820
"": U3.6 U5.1 U5.2 U5.10 U5.11 U5.12 U5.13 U5.14 U5.15 U5.16 U5.17 U5.18 U5.19 U5.20 U5.21 U5.22 U5.23 U5.27 U6.1 U6.3 U6.4 U6.5 U6.6 U6.7 U6.8 U6.9 U6.10 U6.11 U6.12 U7.4 U7.5 U7.6 U7.7 U7.10 U7.11 U7.12 U7.14 U7.16 U7.17 U7.18 U7.19 U7.20 U7.21 U7.22 U7.23 U7.24 U7.26 U7.27 U7.28 U7.29 U7.30 U7.31 U7.32 U7.37 U16.7 U16.18 U18.7 U18.18 U20.7 U20.18 U21.9 U22.7 U22.18 USB3.3 USB3.9 USB3.13 USB3.14

## Polygon pours and split planes (outlines as drawn)
GND on Top Layer (solid, remove dead copper, pour order 0): 3510,3350 9820,3350 9820,5755 3510,5755
GND on Bottom Layer (solid, remove dead copper, pour order 1): 3000,3000 9985,3000 9985,6105 3000,6105

## Silkscreen, mask and mechanical layers (free items; w line width, h text height)
Top Silkscreen Layer:
  text "to my sweetest" at 4293.88,3820.08 h135.94
  text "荧" at 7164.32,3777.91 h178.4
  text "李杰一" at 5060.16,3640.08 h135.94
Bottom Silkscreen Layer:
  text "小周的第一块pcb，为小李" at 7873.54,3875.08 h135.94
Mechanical 1:
  circle w1 net "": c4082.2,5252.4 r59.06
  circle w1 net "": c4082.2,3677.6 r59.06
  circle w1 net "": c9357.8,5252.4 r59.06
  circle w1 net "": c8531.02,3913.82 r59.06
  lines w10 net "": 3964.09,3579.17 9475.91,3579.17 9475.91,5350.83 3964.09,5350.83 3964.09,3579.17